# EAGLE board nutzen_05 (EAGLE 9.6.2), part 1 of 2
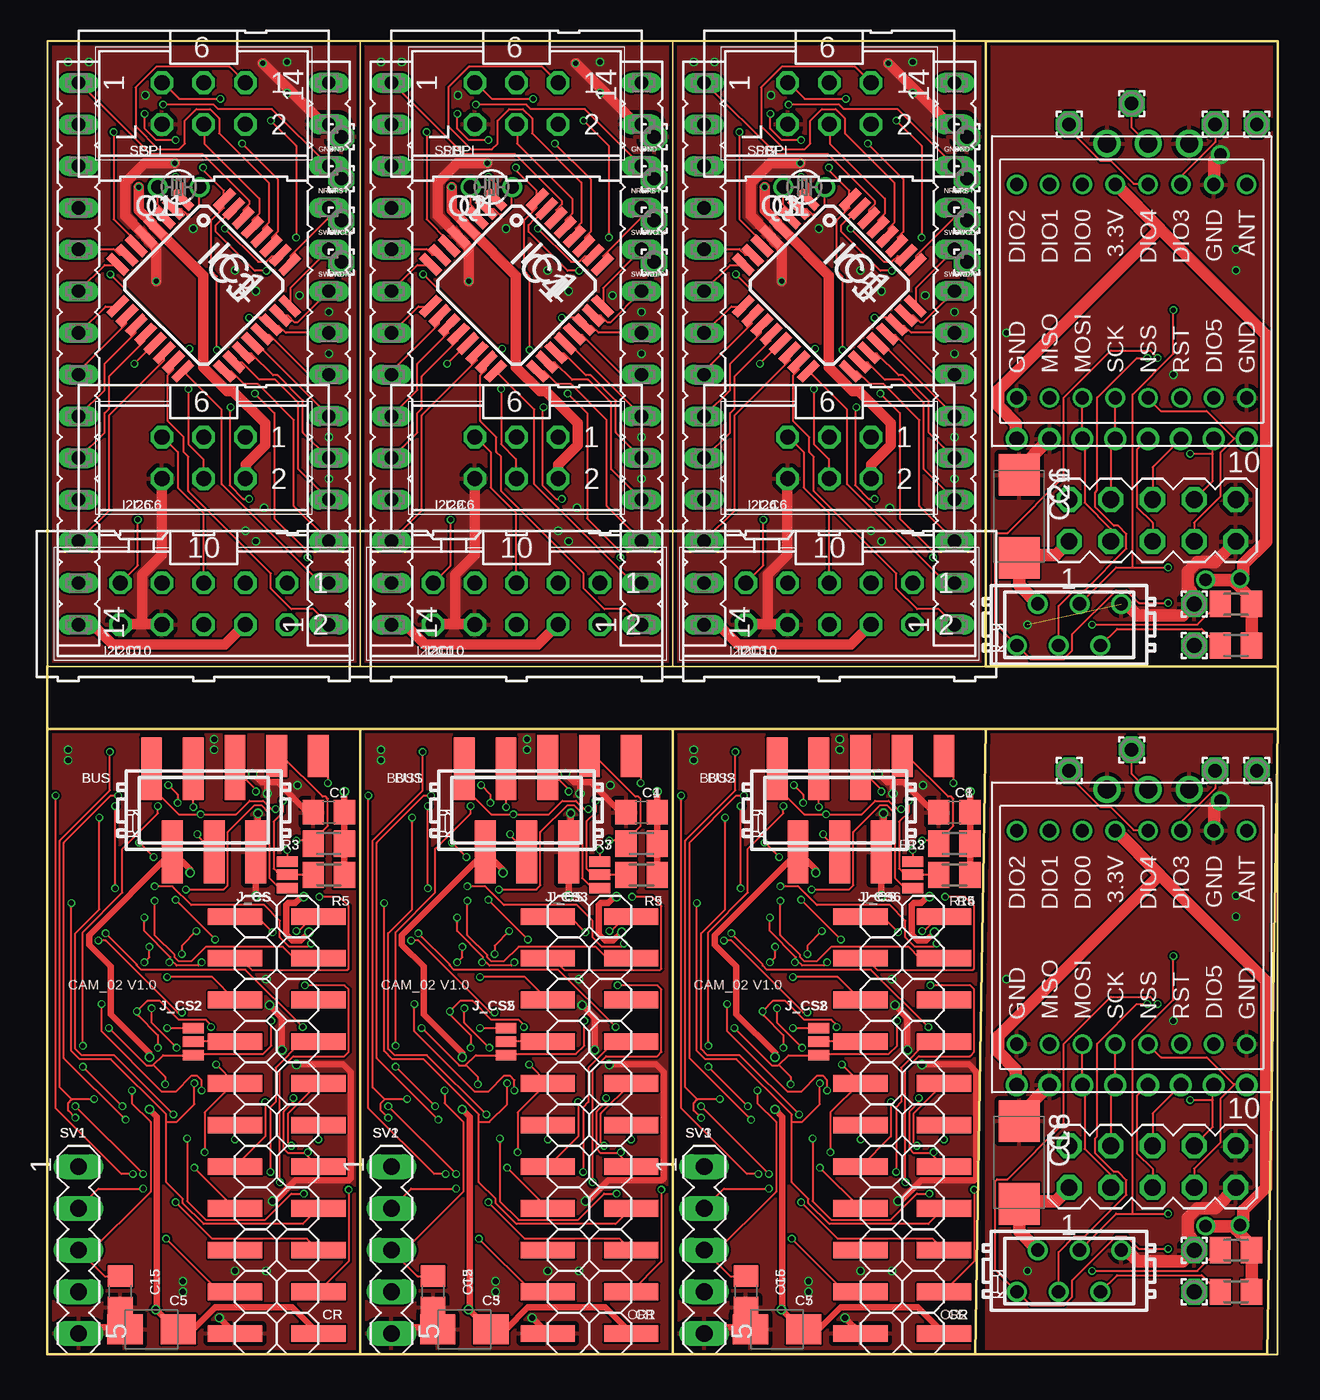
[diagram p0: board, top side]
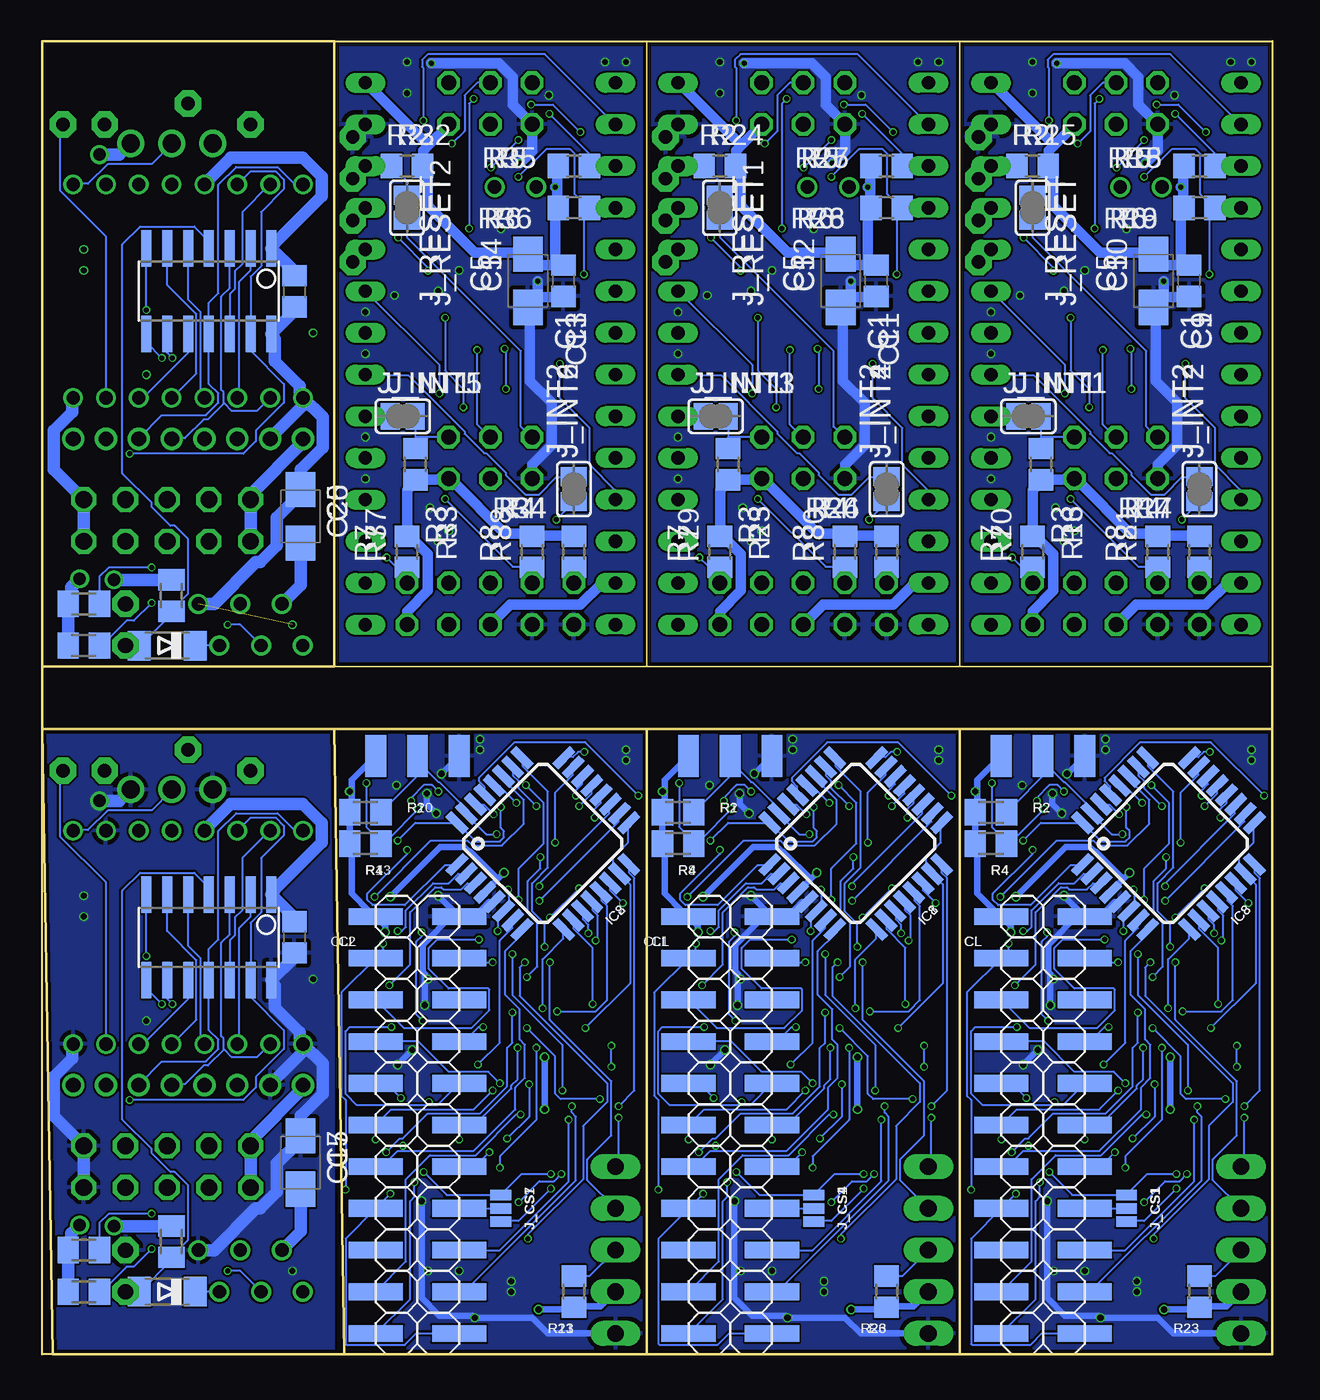
[diagram p1: board, bottom side, seen from below]

Size 74.93 x 80.01 mm. Coordinates in mm from the lower left corner, seen from the top.
Outline: 0,0 19.05,0
Outline: 19.05,38.1 0,38.1
Outline: 0,38.1 0,0
Outline: 19.05,0 38.1,0
Outline: 38.1,38.1 19.05,38.1
Outline: 19.05,38.1 19.05,0
Outline: 38.1,0 56.52,0
Outline: 57.15,38.1 38.1,38.1
Outline: 38.1,38.1 38.1,0
Outline: 0,41.91 19.05,41.91
Outline: 19.05,80.01 0,80.01
Outline: 0,80.01 0,41.91
Outline: 19.05,41.91 38.1,41.91
Outline: 38.1,80.01 19.05,80.01
Outline: 19.05,80.01 19.05,41.91
Outline: 38.1,41.91 57.15,41.91
Outline: 57.15,80.01 38.1,80.01
Outline: 38.1,80.01 38.1,41.91
Outline: 74.93,38.1 74.3,0 56.52,0
Outline: 74.93,38.1 57.15,38.1
Outline: 57.15,38.1 56.52,0
Outline: 74.93,41.91 74.93,80.01
Outline: 74.93,80.01 57.15,80.01
Outline: 57.15,80.01 57.15,41.91
Outline: 57.15,41.91 74.93,41.91
Outline: 0,38.1 0,41.91
Outline: 74.93,38.1 74.93,41.91
Outline: 0,0 74.93,0 74.93,80.01
Outline: 74.93,80.01 0,80.01
Outline: 0,80.01 0,0
Copper layers (1*16): Top 0.035559375mm / dielectric 1.6mm / Bottom 0.035559375mm
Design rules "jlcpcb2layer": minimum track width 5mil, minimum drill 12mil, track to track 5mil, track to pad 5mil, pad to pad 5mil, via to via 5mil, smd to smd 5mil, copper to edge 8mil, drill to drill 6mil, minimum pad ring 5mil, minimum via ring 3mil, stop-mask expansion 2.5mil, vias tented up to drill 0mil, thermal gap 10mil
Net classes: 1 gnd: width 0.381 mm, drill 0.381 mm; 2 power: width 0.381 mm, drill 0.381 mm

## Footprints (pad centres in the part's own frame; a part is rotated, then mirrored left to right if it is on the bottom)
MICROMATCH-6SMD = smd 1.27 x 3.81: 1 3.175,-2.54; 2 1.905,2.54; 3 0.635,-2.54; 4 -0.635,2.54; 5 -1.905,-2.54; 6 -3.175,2.54
C0805 = smd 1.3 x 1.5: 1 -0.95,0; 2 0.95,0
B/3528-21W = smd 2.15 x 1.8: + 1.625,0; - -1.625,0
C/6032-28R = smd 2.55 x 2.5: + 2.525,0; - -2.525,0
2X11SMD = smd 1.016 x 3.302: 1 -1.27,-3.81; 2 -1.27,1.27; 3 1.27,-3.81; 4 1.27,1.27; 5 3.81,-3.81; 6 3.81,1.27; 7 6.35,-3.81; 8 6.35,1.27; 9 8.89,-3.81; 10 8.89,1.27; 11 11.43,-3.81; 12 11.43,1.27; 13 13.97,-3.81; 14 13.97,1.27; 15 16.51,-3.81; 16 16.51,1.27; 17 19.05,-3.81; 18 19.05,1.27; 19 21.59,-3.81; 20 21.59,1.27; 21 24.13,-3.81; 22 24.13,1.27
MINIMELF = smd 1.4 x 1.8: A 1.7,0; C -1.7,0
1,6/0,9 = drill 0.914 pad 1.6 octagon: 1 0,0
1,6/0,8 = drill 0.813 pad 1.6 octagon: 1 0,0
ML10 = drill 0.914 octagon: 1 -5.08,-1.27; 2 -5.08,1.27; 3 -2.54,-1.27; 4 -2.54,1.27; 5 0,-1.27; 6 0,1.27; 7 2.54,-1.27; 8 2.54,1.27; 9 5.08,-1.27; 10 5.08,1.27
ML6 = drill 0.914 octagon: 1 -2.54,-1.27; 2 -2.54,1.27; 3 0,-1.27; 4 0,1.27; 5 2.54,-1.27; 6 2.54,1.27
LQFP-32 = smd 1.5 x 0.5: 1 -1.8,0; 2 -1.8,-0.8; 3 -1.8,-1.6; 4 -1.8,-2.4; 5 -1.8,-3.2; 6 -1.8,-4; 7 -1.8,-4.8; 8 -1.8,-5.6; 17 7.4,-5.6; 18 7.4,-4.8; 19 7.4,-4; 20 7.4,-3.2; 21 7.4,-2.4; 22 7.4,-1.6; 23 7.4,-0.8; 24 7.4,0 | smd 0.5 x 1.5: 9 0,-7.4; 10 0.8,-7.4; 11 1.6,-7.4; 12 2.4,-7.4; 13 3.2,-7.4; 14 4,-7.4; 15 4.8,-7.4; 16 5.6,-7.4; 25 5.6,1.8; 26 4.8,1.8; 27 4,1.8; 28 3.2,1.8; 29 2.4,1.8; 30 1.6,1.8; 31 0.8,1.8; 32 0,1.8
SOIC14 = smd 0.61 x 2.21: 1 -3.81,-2.603; 2 -2.54,-2.603; 3 -1.27,-2.603; 4 0,-2.603; 5 1.27,-2.603; 6 2.54,-2.603; 7 3.81,-2.603; 8 3.81,2.603; 9 2.54,2.603; 10 1.27,2.603; 11 0,2.603; 12 -1.27,2.603; 13 -2.54,2.603; 14 -3.81,2.603
SMT-JUMPER_3_1-NC_PASTE_NO-SILK = smd 0.635 x 1.27: 1 -0.813,0; 2 0,0; 3 0.813,0
SJ = smd 1.168 x 1.6: 1 -0.762,0; 2 0.762,0
FE14 = drill 0.813 long: 1 -15.24,0; 2 -12.7,0; 3 -10.16,0; 4 -7.62,0; 5 -5.08,0; 6 -2.54,0; 7 0,0; 8 2.54,0; 9 5.08,0; 10 7.62,0; 11 10.16,0; 12 12.7,0; 13 15.24,0; 14 17.78,0
SMD1,27-2,54 = smd 1.27 x 2.54: 1 0,0
TC26V = drill 0.813: 1 -1.27,0; 2 1.27,0
M0805 = smd 1.3 x 1.6: 1 -0.95,0; 2 0.95,0
R0805 = smd 1.3 x 1.5: 1 -0.95,0; 2 0.95,0
MA05-1 = drill 1.016 long: 1 -5.08,0; 2 -2.54,0; 3 0,0; 4 2.54,0; 5 5.08,0
MA05-2 = drill 1.016 octagon: 1 -5.08,-1.27; 2 -5.08,1.27; 3 -2.54,-1.27; 4 -2.54,1.27; 5 0,-1.27; 6 0,1.27; 7 2.54,-1.27; 8 2.54,1.27; 9 5.08,-1.27; 10 5.08,1.27
CC1101 = drill 1.1: ANT 9,-1; GND1 9,-3.5; GND2 9,1.5 | drill 0.9: CSN -9,-7; GDO0 -9,-5; GDO2 -9,-3; GND0 -9,5; SCLK -9,1; SI -9,3; SO -9,-1; VCC -9,7
WIRELESS-LORA-RFM95W#THT = drill 0.8: A1 -6.5,7; A2 -6.5,5; A3 -6.5,3; A4 -6.5,1; A5 -6.5,-1; A6 -6.5,-3; A7 -6.5,-5; A8 -6.5,-7; B1 6.5,7; B2 6.5,5; B3 6.5,3; B4 6.5,1; B5 6.5,-1; B6 6.5,-3; B7 6.5,-5; B8 6.5,-7
MICROMATCH-6 = drill 0.813: 1 3.175,1.27; 2 1.905,-1.27; 3 0.635,1.27; 4 -0.635,-1.27; 5 -1.905,1.27; 6 -3.175,-1.27

## Placement (x,y rotation side)
BUS  [MICROMATCH-6SMD]  9.53,33.15 180 top
BUS1  [MICROMATCH-6SMD]  28.57,33.15 180 top
BUS2  [MICROMATCH-6SMD]  47.62,33.15 180 top
C1  0.1  [C0805]  17.14,33.02 180 top
C2  0.1  [C0805]  23.5,3.81 270 top
C3  10u  [B/3528-21W]  25.4,1.52 0 top
C4  0.1  [C0805]  36.2,33.02 180 top
C5  10u  [B/3528-21W]  6.35,1.52 0 top
C6  0.1  [C0805]  42.55,3.81 270 top
C7  10u  [B/3528-21W]  44.45,1.52 0 top
C8  0.1  [C0805]  55.24,33.02 180 top
C9  [C0805]  5.08,65.41 270 bottom
C10  [B/3528-21W]  7.24,65.41 90 bottom
C11  [C0805]  24.13,65.41 270 bottom
C12  [B/3528-21W]  26.29,65.41 90 bottom
C13  [C0805]  43.18,65.41 270 bottom
C14  [B/3528-21W]  45.34,65.41 90 bottom
C15  0.1  [C0805]  4.45,3.81 270 top
C16  100n  [C0805]  59.56,25.4 270 bottom
C17  10u  [B/3528-21W]  59.18,11.68 270 bottom
C18  [C/6032-28R]  59.18,11.68 270 top
C19  100n  [C0805]  59.56,64.77 270 bottom
C20  10u  [B/3528-21W]  59.18,51.05 270 bottom
C21  [C/6032-28R]  59.18,51.05 270 top
CL  [2X11SMD]  12.7,25.4 270 bottom
CL1  [2X11SMD]  31.75,25.4 270 bottom
CL2  [2X11SMD]  50.8,25.4 270 bottom
CR  [2X11SMD]  12.7,2.54 90 top
CR1  [2X11SMD]  31.75,2.54 90 top
CR2  [2X11SMD]  50.8,2.54 90 top
D1  [MINIMELF]  67.31,43.18 180 bottom
D2  [MINIMELF]  67.31,3.81 180 bottom
DW  [1,6/0,9]  69.85,3.81 90 top
DW1  [1,6/0,9]  69.85,43.18 90 top
GND  [1,6/0,8]  17.91,74.17 0 top
GND1  [1,6/0,8]  36.96,74.17 0 top
GND2  [1,6/0,8]  56.01,74.17 0 top
GND_  [1,6/0,9]  69.85,6.35 90 top
GND_1  [1,6/0,9]  69.85,45.72 90 top
I2C1  [ML10]  28.57,45.72 180 top
I2C2  [ML6]  28.57,54.61 180 top
I2C3  [ML10]  47.62,45.72 180 top
I2C4  [ML6]  47.62,54.61 180 top
I2C6  [ML6]  9.53,54.61 180 top
I2C10  [ML10]  9.53,45.72 180 top
IC1  STM32G071KBT6N  [LQFP-32]  29.34,31.11 45 bottom
IC2  STM32G071KBT6N  [LQFP-32]  48.39,31.11 45 bottom
IC3  STM32G071  [LQFP-32]  9.53,69.09 315 top
IC4  STM32G071  [LQFP-32]  28.57,69.09 315 top
IC5  STM32G071  [LQFP-32]  47.62,69.09 315 top
IC6  TINY84 or TINY841  [SOIC14]  64.77,25.4 180 bottom
IC7  TINY84 or TINY841  [SOIC14]  64.77,64.77 180 bottom
IC8  STM32G071KBT6N  [LQFP-32]  10.29,31.11 45 bottom
J_CS  [SMT-JUMPER_3_1-NC_PASTE_NO-SILK]  14.61,29.21 270 top
J_CS1  [SMT-JUMPER_3_1-NC_PASTE_NO-SILK]  8.89,8.89 90 bottom
J_CS2  [SMT-JUMPER_3_1-NC_PASTE_NO-SILK]  8.89,19.05 270 top
J_CS3  [SMT-JUMPER_3_1-NC_PASTE_NO-SILK]  33.66,29.21 270 top
J_CS4  [SMT-JUMPER_3_1-NC_PASTE_NO-SILK]  27.94,8.89 90 bottom
J_CS5  [SMT-JUMPER_3_1-NC_PASTE_NO-SILK]  27.94,19.05 270 top
J_CS6  [SMT-JUMPER_3_1-NC_PASTE_NO-SILK]  52.7,29.21 270 top
J_CS7  [SMT-JUMPER_3_1-NC_PASTE_NO-SILK]  46.99,8.89 90 bottom
J_CS8  [SMT-JUMPER_3_1-NC_PASTE_NO-SILK]  46.99,19.05 270 top
J_INT1  [SJ]  14.86,57.15 180 bottom
J_INT2  [SJ]  4.45,52.7 90 bottom
J_INT3  [SJ]  33.91,57.15 180 bottom
J_INT4  [SJ]  23.5,52.7 90 bottom
J_INT5  [SJ]  52.96,57.15 180 bottom
J_INT6  [SJ]  42.55,52.7 90 bottom
J_RESET  [SJ]  14.61,69.85 90 bottom
J_RESET1  [SJ]  33.66,69.85 90 bottom
J_RESET2  [SJ]  52.7,69.85 90 bottom
L  [FE14]  1.91,62.23 270 top
L1  [FE14]  20.95,62.23 270 top
L2  [FE14]  40.01,62.23 270 top
NRST  [1,6/0,8]  17.91,71.63 0 top
NRST1  [1,6/0,8]  36.96,71.63 0 top
NRST2  [1,6/0,8]  56.01,71.63 0 top
PAD1  [SMD1,27-2,54]  16.51,36.45 0 top
PAD2  [SMD1,27-2,54]  16.51,36.45 0 bottom
PAD3  [SMD1,27-2,54]  13.97,36.45 0 top
PAD4  [SMD1,27-2,54]  13.97,36.45 0 bottom
PAD5  [SMD1,27-2,54]  11.43,36.45 0 top
PAD6  [SMD1,27-2,54]  11.43,36.45 0 bottom
PAD7  [SMD1,27-2,54]  35.56,36.45 0 top
PAD8  [SMD1,27-2,54]  35.56,36.45 0 bottom
PAD9  [SMD1,27-2,54]  33.02,36.45 0 top
PAD10  [SMD1,27-2,54]  33.02,36.45 0 bottom
PAD11  [SMD1,27-2,54]  30.48,36.45 0 top
PAD12  [SMD1,27-2,54]  30.48,36.45 0 bottom
PAD13  [SMD1,27-2,54]  54.61,36.45 0 top
PAD14  [SMD1,27-2,54]  54.61,36.45 0 bottom
PAD15  [SMD1,27-2,54]  52.07,36.45 0 top
PAD16  [SMD1,27-2,54]  52.07,36.45 0 bottom
PAD17  [SMD1,27-2,54]  49.53,36.45 0 top
PAD18  [SMD1,27-2,54]  49.53,36.45 0 bottom
PAD19  [1,6/0,8]  66.04,36.83 90 top
PAD20  [1,6/0,8]  71.12,35.56 90 top
PAD21  [1,6/0,8]  62.23,35.56 90 top
PAD22  [1,6/0,8]  73.66,35.56 90 top
PAD23  [1,6/0,8]  66.04,76.2 90 top
PAD24  [1,6/0,8]  71.12,74.93 90 top
PAD25  [1,6/0,8]  62.23,74.93 90 top
PAD26  [1,6/0,8]  73.66,74.93 90 top
Q1  [TC26V]  8,71.12 0 top
Q2  [TC26V]  27.05,71.12 0 top
Q3  [TC26V]  46.1,71.12 0 top
R  [FE14]  17.14,59.69 90 top
R1  10k  [M0805]  36.2,33.02 0 bottom
R2  10k  [M0805]  17.14,33.02 0 bottom
R3  10k  [M0805]  17.14,31.11 180 top
R4  10k  [M0805]  17.14,31.11 0 bottom
R5  10k  [M0805]  17.14,29.21 180 top
R6  100K  [R0805]  23.5,3.81 270 bottom
R7  10k  [M0805]  36.2,31.11 180 top
R8  10k  [M0805]  36.2,31.11 0 bottom
R9  10k  [M0805]  36.2,29.21 180 top
R10  10k  [M0805]  55.24,33.02 0 bottom
R11  100K  [R0805]  42.55,3.81 270 bottom
R12  10k  [M0805]  55.24,31.11 180 top
R13  10k  [M0805]  55.24,31.11 0 bottom
R14  10k  [M0805]  55.24,29.21 180 top
R15  [R0805]  14.61,72.39 0 bottom
R16  [R0805]  14.1,54.23 270 bottom
R17  [R0805]  4.45,48.9 90 bottom
R18  [R0805]  4.45,72.39 180 bottom
R19  [R0805]  4.45,69.85 180 bottom
R20  [R0805]  14.61,48.9 90 bottom
R21  [R0805]  6.99,48.9 90 bottom
R22  [FE14]  36.2,59.69 90 top
R23  100K  [R0805]  4.45,3.81 270 bottom
R24  [R0805]  33.66,72.39 0 bottom
R25  [R0805]  33.15,54.23 270 bottom
R26  [R0805]  23.5,48.9 90 bottom
R27  [R0805]  23.5,72.39 180 bottom
R28  [R0805]  23.5,69.85 180 bottom
R29  [R0805]  33.66,48.9 90 bottom
R30  [R0805]  26.04,48.9 90 bottom
R31  [FE14]  55.24,59.69 90 top
R32  [R0805]  52.7,72.39 0 bottom
R33  [R0805]  52.2,54.23 270 bottom
R34  [R0805]  42.55,48.9 90 bottom
R35  [R0805]  42.55,72.39 180 bottom
R36  [R0805]  42.55,69.85 180 bottom
R37  [R0805]  52.7,48.9 90 bottom
R38  [R0805]  45.09,48.9 90 bottom
R39  10k  [M0805]  67.06,6.86 270 bottom
R40  10k  [M0805]  72.39,6.35 0 bottom
R41  10k  [M0805]  72.39,6.35 180 top
R42  10k  [M0805]  72.39,3.81 0 bottom
R43  10k  [M0805]  72.39,3.81 180 top
R44  10k  [M0805]  67.06,46.23 270 bottom
R45  10k  [M0805]  72.39,45.72 0 bottom
R46  10k  [M0805]  72.39,45.72 180 top
R47  10k  [M0805]  72.39,43.18 0 bottom
R48  10k  [M0805]  72.39,43.18 180 top
SPI  [ML6]  9.53,76.2 180 top
SPI1  [ML6]  28.57,76.2 180 top
SPI2  [ML6]  47.62,76.2 180 top
SV1  [MA05-1]  1.91,6.35 270 top
SV2  [MA05-1]  20.95,6.35 270 top
SV3  [MA05-1]  40.01,6.35 270 top
SV4  [MA05-2]  67.31,11.43 0 top
SV5  [MA05-2]  67.31,50.8 0 top
SWCLK  [1,6/0,8]  17.91,69.09 0 top
SWCLK1  [1,6/0,8]  36.96,69.09 0 top
SWCLK2  [1,6/0,8]  56.01,69.09 0 top
SWDIO  [1,6/0,8]  17.91,66.55 0 top
SWDIO1  [1,6/0,8]  36.96,66.55 0 top
SWDIO2  [1,6/0,8]  56.01,66.55 0 top
U$1  CC1101  [CC1101]  66.04,25.4 90 top
U$2  CC1101  [CC1101]  66.04,64.77 90 top
U$3  WIRELESS-LORA-RFM95W#THT  [WIRELESS-LORA-RFM95W#THT]  66.04,25.4 90 top
U$4  WIRELESS-LORA-RFM95W#THT  [WIRELESS-LORA-RFM95W#THT]  66.04,64.77 90 top
X1  BUS  [MICROMATCH-6]  62.23,5.08 180 top
X2  BUS  [MICROMATCH-6]  62.23,44.45 180 top

## Library data of the parts
BUS BUS1 BUS2 = con-amp-micromatch
C1 C2 C4 C6 C8 C15 C16 C19 R6 R11 R23 = rcl
C3 C5 C7 C9-C14 C17 C18 C20 C21 = rcl; SPICEPREFIX: C
CL CL1 CL2 CR CR1 CR2 = pinhead-1
D1 D2 = diode
DW DW1 GND GND1 GND2 GND_ GND_1 NRST NRST1 NRST2 PAD1-PAD26 SWCLK SWCLK1 SWCLK2 SWDIO SWDIO1 SWDIO2 = wirepad
I2C1-I2C4 I2C6 I2C10 SPI SPI1 SPI2 = con-harting-ml; OC_FARNELL: unknown; OC_NEWARK: unknown
IC1-IC5 IC8 = stm32
IC6 IC7 = avr-7
J_CS J_CS1-J_CS8 = SparkFun-Jumpers
J_INT1-J_INT6 J_RESET J_RESET1 J_RESET2 = jumper
L L1 L2 R R22 R31 = con-lsta-my
Q1-Q3 = crystal; OC_FARNELL: unknown; OC_NEWARK: unknown
R1-R5 R7-R10 R12-R21 R24-R30 R32-R48 = rcl; SPICEPREFIX: R
SV1-SV5 = con-lstb; OC_FARNELL: unknown; OC_NEWARK: unknown
U$1 U$2 = modules
U$3 U$4 = diy-modules
X1 X2 = con-amp-micromatch; MPN: 7-215464-6; OC_FARNELL: 3784630; OC_NEWARK: 19R8125

## Nets
BUS_INT: IC6.8 R42.2 X1.1
BUS_INT1: IC7.8 R47.2 X2.1
BUS_P1: BUS1.5 J_CS3.2 PAD11.1 R9.2
BUS_P2: BUS2.5 J_CS6.2 PAD17.1 R14.2
BUS_P5: BUS.5 J_CS.2 PAD5.1 R5.2
BUS_RESET: I2C6.5 I2C10.5 J_RESET.1
BUS_RESET1: I2C1.5 I2C2.5 J_RESET1.1
BUS_RESET2: I2C3.5 I2C4.5 J_RESET2.1
BUS_RESET3: D2.C R43.2 X1.5
BUS_RESET4: D1.C R48.2 X2.5
BUS_SCL: IC6.9 R41.2 X1.3
BUS_SCL1: IC7.9 R46.2 X2.3
BUS_SDA: IC6.7 R40.2 X1.4
BUS_SDA1: IC7.7 R45.2 X2.4
C_D0: CL.14 CR.14 IC8.7
C_D1: CL.13 CR.13 IC8.8
C_D2: CL.12 CR.12 IC8.9
C_D3: CL.11 CR.11 IC8.10
C_D4: CL.10 CR.10 IC8.11
C_D5: CL.9 CR.9 IC8.12
C_D6: CL.8 CR.8 IC8.13
C_D7: CL.7 CR.7 IC8.14
C_D8: CL1.7 CR1.7 IC1.14
C_D9: CL1.8 CR1.8 IC1.13
C_D10: CL1.9 CR1.9 IC1.12
C_D11: CL1.10 CR1.10 IC1.11
C_D12: CL1.11 CR1.11 IC1.10
C_D13: CL1.12 CR1.12 IC1.9
C_D14: CL1.13 CR1.13 IC1.8
C_D15: CL1.14 CR1.14 IC1.7
C_D16: CL2.7 CR2.7 IC2.14
C_D17: CL2.8 CR2.8 IC2.13
C_D18: CL2.9 CR2.9 IC2.12
C_D19: CL2.10 CR2.10 IC2.11
C_D20: CL2.11 CR2.11 IC2.10
C_D21: CL2.12 CR2.12 IC2.9
C_D22: CL2.13 CR2.13 IC2.8
C_D23: CL2.14 CR2.14 IC2.7
CL_OE: CL.20 IC8.26
CL_OE1: CL1.20 IC1.26
CL_OE2: CL2.20 IC2.26
CL_PWDN: CL.16 J_CS1.2
CL_PWDN1: CL1.16 J_CS4.2
CL_PWDN2: CL2.16 J_CS7.2
CL_RCK: CL.18 IC8.22
CL_RCK1: CL1.18 IC1.22
CL_RCK2: CL2.18 IC2.22
CL_RST: CL.15 CL.22 CR.22 IC8.15 IC8.17 J_CS2.3
CL_RST1: CL1.15 CL1.22 CR1.22 IC1.15 IC1.17 J_CS5.3
CL_RST2: CL2.15 CL2.22 CR2.22 IC2.15 IC2.17 J_CS8.3
CL_VSYNC: CL.5 IC8.28
CL_VSYNC1: CL1.5 IC1.28
CL_VSYNC2: CL2.5 IC2.28
CL_WR: CL.19 IC8.20
CL_WR1: CL1.19 IC1.20
CL_WR2: CL2.19 IC2.20
CL_WRST: CL.21 IC8.3
CL_WRST1: CL1.21 IC1.3
CL_WRST2: CL2.21 IC2.3
CR_OE: CR.20 IC8.27
CR_OE1: CR1.20 IC1.27
CR_OE2: CR2.20 IC2.27
CR_PWDN: CR.16 J_CS2.2
CR_PWDN1: CR1.16 J_CS5.2
CR_PWDN2: CR2.16 J_CS8.2
CR_RCK: CR.18 IC8.23
CR_RCK1: CR1.18 IC1.23
CR_RCK2: CR2.18 IC2.23
CR_RST: CR.15 IC8.16 J_CS1.3
CR_RST1: CR1.15 IC1.16 J_CS4.3
CR_RST2: CR2.15 IC2.16 J_CS7.3
CR_VSYNC: CR.5 IC8.29
CR_VSYNC1: CR1.5 IC1.29
CR_VSYNC2: CR2.5 IC2.29
CR_WR: CR.19 IC8.18
CR_WR1: CR1.19 IC1.18
CR_WR2: CR2.19 IC2.18
CR_WRST: CR.21 IC8.2
CR_WRST1: CR1.21 IC1.2
CR_WRST2: CR2.21 IC2.2
CS0: IC6.6 SV4.7 U$1.CSN U$3.A5
CS1: IC7.6 SV5.7 U$2.CSN U$4.A5
DW: D2.A DW.1 IC6.4 R39.2
DW1: D1.A DW1.1 IC7.4 R44.2
FON1: I2C1.3
FON2: I2C10.3
FON3: I2C3.3
GND [gnd]: BUS.6 C1.2 C5.- C15.2 CL.2 CR.2 IC8.5 PAD6.1 SV1.5
GND1 [gnd]: BUS1.6 C2.2 C3.- C4.2 CL1.2 CR1.2 IC1.5 PAD12.1 SV2.5
GND2 [gnd]: BUS2.6 C6.2 C7.- C8.2 CL2.2 CR2.2 IC2.5 PAD18.1 SV3.5
GND3 [gnd]: C9.2 C10.- GND.1 I2C6.6 I2C10.8 I2C10.10 IC3.5 R.13 SPI.6
GND4 [gnd]: C11.2 C12.- GND1.1 I2C1.8 I2C1.10 I2C2.6 IC4.5 R22.13 SPI1.6
GND5 [gnd]: C13.2 C14.- GND2.1 I2C3.8 I2C3.10 I2C4.6 IC5.5 R31.13 SPI2.6
GND6 [gnd]: C16.2 C17.- C18.- GND_.1 IC6.14 SV4.9 SV4.10 U$1.GND0 U$1.GND1 U$1.GND2 U$3.A1 U$3.A8 U$3.B7 X1.6
GND7 [gnd]: C19.2 C20.- C21.- GND_1.1 IC7.14 SV5.9 SV5.10 U$2.GND0 U$2.GND1 U$2.GND2 U$4.A1 U$4.A8 U$4.B7 X2.6
GPIO0: IC6.13 SV4.8 U$1.GDO0 U$3.B3
GPIO1: IC6.12 U$3.B2
GPIO2: IC6.11 SV4.6 U$1.GDO2 U$3.B1
GPIO3: IC7.13 SV5.8 U$2.GDO0 U$4.B3
GPIO4: IC7.11 SV5.6 U$2.GDO2 U$4.B1
GPIO5: IC7.12 U$4.B2
INT1: I2C6.1 J_INT1.1 R16.1
INT2: I2C10.9 J_INT2.1 R17.1
INT3: I2C2.1 J_INT3.1 R25.1
INT4: I2C1.9 J_INT4.1 R26.1
INT5: I2C4.1 J_INT5.1 R33.1
INT6: I2C3.9 J_INT6.1 R34.1
MISO: IC6.3 SV4.5 U$1.SO U$3.A2
MISO1: IC7.3 SV5.5 U$2.SO U$4.A2
MOSI: IC6.2 SV4.3 U$1.SI U$3.A3
MOSI1: IC7.2 SV5.3 U$2.SI U$4.A3
N$1: IC4.2 Q2.2
N$2: IC4.3 Q2.1
N$3: IC5.2 Q3.2
N$4: IC5.3 Q3.1
N$5: PAD19.1 U$1.ANT U$3.B8
N$6: PAD20.1 U$3.B6
N$7: PAD21.1 U$3.B5
N$8: PAD22.1 U$3.A7
N$9: PAD23.1 U$2.ANT U$4.B8
N$10: PAD24.1 U$4.B6
N$11: PAD25.1 U$4.B5
N$12: PAD26.1 U$4.A7
N$30: IC3.2 Q1.2
N$31: IC3.3 Q1.1
NRST: IC3.6 J_RESET.2 NRST.1 R15.1 R.12
NRST1: IC4.6 J_RESET1.2 NRST1.1 R22.12 R24.1
NRST2: IC5.6 J_RESET2.2 NRST2.1 R31.12 R32.1
PA0: IC3.7 L.5
PA1: IC3.8 L.6
PA2: IC3.9 L.7
PA3: IC3.10 L.8
PA4: IC3.11 L.9
PA5: IC3.12 L.10
PA6: IC3.13 L.11
PA7: IC3.14 L.12
PA8: IC3.18 R.4
PA9: IC3.19 R.5
PA10: IC3.21 J_INT2.2 R.7
PA11: IC4.7 L1.5
PA12: IC4.8 L1.6
PA13: IC4.9 L1.7
PA14: IC4.10 L1.8
PA15: IC4.11 L1.9
PA16: IC4.12 L1.10
PA17: IC4.18 R22.4
PA18: IC4.19 R22.5
PA19: IC4.13 L1.11
PA20: IC4.14 L1.12
PA21: IC4.21 J_INT4.2 R22.7
PA22: IC5.7 L2.5
PA23: IC5.8 L2.6
PA24: IC5.9 L2.7
PA25: IC5.10 L2.8
PA26: IC5.11 L2.9
PA27: IC5.12 L2.10
PA28: IC5.18 R31.4
PA29: IC5.19 R31.5
PA30: IC5.13 L2.11
PA31: IC5.14 L2.12
PA32: IC5.21 J_INT6.2 R31.7
PB0: IC3.15 R.1
PB1: IC3.16 R.2
PB2: IC4.16 R22.2
PB3: IC4.17 R22.3
PB4: IC4.30 L1.1
PB5: IC4.15 R22.1
PB6: IC3.30 L.1
PB7: IC3.31 L.2
PB8: IC4.31 L1.2
PB9: IC5.16 R31.2
PB10: IC5.17 R31.3
PB11: IC5.30 L2.1
PB12: IC5.15 R31.1
PB13: IC5.31 L2.2
PB15: IC3.17 R.3
PC1: IC4.20 J_INT3.2 R22.6
PC2: IC5.20 J_INT5.2 R31.6
PC6: IC3.20 J_INT1.2 R.6
RESOUT: IC6.10 U$3.A6
RESOUT1: IC7.10 U$4.A6
SCK: IC6.5 SV4.4 U$1.SCLK U$3.A4
SCK1: IC7.5 SV5.4 U$2.SCLK U$4.A4
SCL: CL.3 CR.3 IC8.19
SCL1: CL1.3 CR1.3 IC1.19
SCL2: CL2.3 CR2.3 IC2.19
SCL3: I2C6.3 IC3.32 L.3 R18.1
SCL4: I2C10.7 IC3.22 R21.1 R.8
SCL5: I2C2.3 IC4.32 L1.3 R27.1
SCL6: I2C1.7 IC4.22 R22.8 R30.1
SCL7: I2C4.3 IC5.32 L2.3 R35.1
SCL8: I2C3.7 IC5.22 R31.8 R38.1
SDA: CL.4 CR.4 IC8.21
SDA1: CL1.4 CR1.4 IC1.21
SDA2: CL2.4 CR2.4 IC2.21
SDA3: I2C6.4 IC3.1 L.4 R19.1
SDA4: I2C10.1 IC3.23 R20.1 R.9
SDA5: I2C2.4 IC4.1 L1.4 R28.1
SDA6: I2C1.1 IC4.23 R22.9 R29.1
SDA7: I2C4.4 IC5.1 L2.4 R36.1
SDA8: I2C3.1 IC5.23 R31.9 R37.1
SPI1_MISO: IC3.28 SPI.1
SPI1_MISO1: IC4.28 SPI1.1
SPI1_MISO2: IC5.28 SPI2.1
SPI1_MOSI: IC3.29 SPI.4
SPI1_MOSI1: IC4.29 SPI1.4
SPI1_MOSI2: IC5.29 SPI2.4
SPI1_SCK: IC3.27 SPI.3
SPI1_SCK1: IC4.27 SPI1.3
SPI1_SCK2: IC5.27 SPI2.3
SPI1_SS: IC3.26 SPI.5
SPI1_SS1: IC4.26 SPI1.5
SPI1_SS2: IC5.26 SPI2.5
SPI_CS: IC8.1 J_CS.1
SPI_CS1: IC1.1 J_CS3.1
SPI_CS2: IC2.1 J_CS6.1
SPI_MISO: BUS.1 IC8.30 PAD1.1 R4.2
SPI_MISO1: BUS1.1 IC1.30 PAD7.1 R8.2
SPI_MISO2: BUS2.1 IC2.30 PAD13.1 R13.2
SPI_MOSI: BUS.4 IC8.31 PAD4.1 R2.2
SPI_MOSI1: BUS1.4 IC1.31 PAD10.1 R1.2
SPI_MOSI2: BUS2.4 IC2.31 PAD16.1 R10.2
SPI_SCK: BUS.3 IC8.32 PAD3.1 R3.2
SPI_SCK1: BUS1.3 IC1.32 PAD9.1 R7.2
SPI_SCK2: BUS2.3 IC2.32 PAD15.1 R12.2
SWCLK: IC8.25 J_CS1.1 SV1.2
SWCLK1: IC1.25 J_CS4.1 SV2.2
SWCLK2: IC2.25 J_CS7.1 SV3.2
SWCLK3: IC3.25 R.11 SWCLK.1
SWCLK4: IC4.25 R22.11 SWCLK1.1
SWCLK5: IC5.25 R31.11 SWCLK2.1
SWDIO: IC8.24 J_CS2.1 SV1.1
SWDIO1: IC1.24 J_CS5.1 SV2.1
SWDIO2: IC2.24 J_CS8.1 SV3.1
SWDIO3: IC3.24 R.10 SWDIO.1
SWDIO4: IC4.24 R22.10 SWDIO1.1
SWDIO5: IC5.24 R31.10 SWDIO2.1
SWRES: C15.1 IC8.6 J_CS.3 R23.1 SV1.3
SWRES1: C2.1 IC1.6 J_CS3.3 R6.1 SV2.3
SWRES2: C6.1 IC2.6 J_CS6.3 R11.1 SV3.3
U1 [power]: I2C1.4 L1.14
U2 [power]: I2C3.4 L2.14
U3.1 [power]: BUS1.2 C3.+ C4.1 CL1.1 CR1.1 IC1.4 PAD8.1 R1.1 R6.2 R7.1 R8.1 R9.1 SV2.4
U3.2 [power]: BUS2.2 C7.+ C8.1 CL2.1 CR2.1 IC2.4 PAD14.1 R10.1 R11.2 R12.1 R13.1 R14.1 SV3.4
U3.3 [power]: BUS.2 C1.1 C5.+ CL.1 CR.1 IC8.4 PAD2.1 R2.1 R3.1 R4.1 R5.1 R23.2 SV1.4
U5 [power]: I2C10.4 L.14
UBAT [power]: I2C10.6 L.13
UBAT1 [power]: I2C1.6 L1.13
UBAT2 [power]: I2C3.6 L2.13
VCC [power]: C9.1 C10.+ I2C6.2 I2C10.2 IC3.4 R15.2 R16.2 R17.2 R18.2 R19.2 R20.2 R21.2 R.14 SPI.2
VCC1 [power]: C11.1 C12.+ I2C1.2 I2C2.2 IC4.4 R22.14 R24.2 R25.2 R26.2 R27.2 R28.2 R29.2 R30.2 SPI1.2
VCC2 [power]: C13.1 C14.+ I2C3.2 I2C4.2 IC5.4 R31.14 R32.2 R33.2 R34.2 R35.2 R36.2 R37.2 R38.2 SPI2.2
VCC3 [power]: C16.1 C17.+ C18.+ IC6.1 R39.1 R40.1 R41.1 R42.1 R43.1 SV4.1 SV4.2 U$1.VCC U$3.B4 X1.2
VCC4 [power]: C19.1 C20.+ C21.+ IC7.1 R44.1 R45.1 R46.1 R47.1 R48.1 SV5.1 SV5.2 U$2.VCC U$4.B4 X2.2

## Tracks (layer width: path | path; a pad name or v marks a point on that pad's centre or on a via)
BUS_INT  (via drill 0.3)
  Top 0.127: v68.26,6.41 66.48,6.41 65.72,7.18 65.09,7.18 62.42,4.51 62.42,3.49 61.91,2.98 59.88,2.98 X1.1 57.72,5.14 57.72,10.54 57.85,10.67 58.48,10.67 61.91,14.1 61.91,18.92 64.77,21.78 67.18,21.78 v67.63,21.34
  Bottom 0.127: R42.2 71.31,3.81 69.79,5.33 69.34,5.33 v68.26,6.41 | IC6.8 68.58,22.29 v67.63,21.34
BUS_INT1  (via drill 0.3)
  Top 0.127: v68.26,45.78 66.48,45.78 65.72,46.55 65.09,46.55 62.42,43.88 62.42,42.86 61.91,42.35 59.88,42.35 X2.1 57.72,44.51 57.72,49.91 57.85,50.04 58.48,50.04 61.91,53.47 61.91,58.29 64.77,61.15 67.18,61.15 v67.63,60.71
  Bottom 0.127: R47.2 71.31,43.18 69.79,44.7 69.34,44.7 v68.26,45.78 | IC7.8 68.58,61.66 v67.63,60.71
BUS_P1  (via drill 0.3)
  Top 0.127: R9.2 J_CS3.2 33.21,29.21 32.83,29.59 32.83,32.45 33.4,33.02 v33.4,33.72 | v31.75,34.29 31.75,34.42 BUS1.5 PAD11.1
  Bottom 0.127: v33.4,33.72 33.4,33.91 32.64,34.67 32.13,34.67 v31.75,34.29
BUS_P2  (via drill 0.3)
  Top 0.127: R14.2 J_CS6.2 52.26,29.21 51.88,29.59 51.88,32.45 52.45,33.02 v52.45,33.72 | v50.8,34.29 50.8,34.42 BUS2.5 PAD17.1
  Bottom 0.127: v52.45,33.72 52.45,33.91 51.69,34.67 51.18,34.67 v50.8,34.29
BUS_P5  (via drill 0.3)
  Top 0.127: R5.2 J_CS.2 14.16,29.21 13.78,29.59 13.78,32.45 14.35,33.02 v14.35,33.72 | v12.7,34.29 12.7,34.42 BUS.5 PAD5.1
  Bottom 0.127: v14.35,33.72 14.35,33.91 13.59,34.67 13.08,34.67 v12.7,34.29
BUS_RESET
  Top 0.127: I2C10.5 9.49,47.01 9.49,51.27 7.96,52.81 7.96,54.97 7.05,55.88 I2C6.5
  Bottom 0.127: J_RESET.1 14.59,69.08 14.59,68.03 7.68,61.12 7.68,56.51 7.05,55.88 I2C6.5
BUS_RESET1
  Top 0.127: I2C1.5 28.54,47.01 28.54,51.27 27.01,52.81 27.01,54.97 26.1,55.88 I2C2.5
  Bottom 0.127: J_RESET1.1 33.64,69.08 33.64,68.03 26.73,61.12 26.73,56.51 26.1,55.88 I2C2.5
BUS_RESET2
  Top 0.127: I2C3.5 47.59,47.01 47.59,51.27 46.06,52.81 46.06,54.97 45.15,55.88 I2C4.5
  Bottom 0.127: J_RESET2.1 52.69,68.03 45.78,61.12 45.78,56.51 45.15,55.88 I2C4.5
BUS_RESET3
  Top 0.127: R43.2 71.31,3.81 70.29,4.83 65.15,4.83 X1.5
  Bottom 0.127: X1.5 D2.C
BUS_RESET4
  Top 0.127: R48.2 71.31,43.18 70.29,44.2 65.15,44.2 X2.5
  Bottom 0.127: X2.5 D1.C
BUS_SCL  (via drill 0.3)
  Top 0.127: R41.2 71.31,6.35 70.04,5.08 v63.63,5.08 | v66.99,21.34 66.36,21.34 63.94,18.92 63.94,13.27 63.82,13.14 63.82,12.26 64.96,11.11 65.22,11.11 65.72,10.6 65.72,9.72 63.18,7.18 62.55,7.18 61.59,6.22 X1.3
  Bottom 0.127: v63.63,5.08 62.87,5.08 X1.3 | IC6.9 67.31,21.65 v66.99,21.34
BUS_SCL1  (via drill 0.3)
  Top 0.127: R46.2 71.31,45.72 70.04,44.45 v63.63,44.45 | v66.99,60.71 66.36,60.71 63.94,58.29 63.94,52.64 63.82,52.51 63.82,51.63 64.96,50.48 65.22,50.48 65.72,49.97 65.72,49.09 63.18,46.55 62.55,46.55 61.59,45.59 X2.3
  Bottom 0.127: v63.63,44.45 62.87,44.45 X2.3 | IC7.9 67.31,61.02 v66.99,60.71
BUS_SDA  (via drill 0.3)
  Top 0.127: 66.1,8.57 65.09,8.57 X1.4 | 66.1,8.57 v68.26,8.57 | v68.58,24.26 68.58,21.59 66.1,19.11 66.1,8.57
  Bottom 0.127: v68.26,8.57 70.87,8.57 71.44,8 R40.2 | v68.58,24.26 IC6.7
BUS_SDA1  (via drill 0.3)
  Top 0.127: 66.1,47.94 65.09,47.94 X2.4 | 66.1,47.94 v68.26,47.94 | v68.58,63.63 68.58,60.96 66.1,58.48 66.1,47.94
  Bottom 0.127: v68.26,47.94 70.87,47.94 71.44,47.37 R45.2 | v68.58,63.63 IC7.7
C_D0  (via drill 0.3)
  Top 0.127: v10.29,17.65 CR.14 11.37,16.51 9.59,14.73 v9.59,12.32
  Bottom 0.127: v10.29,17.65 8.95,18.99 8.95,25.21 8.19,25.97 8.19,26.42 IC8.7 | CL.14 10.48,11.43 v9.59,12.32
C_D1  (via drill 0.3)
  Top 0.127: CR.13 14.67,14.67 14.67,12.89 v14.86,12.7
  Bottom 0.127: 14.86,12.38 15.18,12.38 16.13,11.43 CL.13 | 14.86,12.38 10.54,12.38 8,14.92 8,16.26 7.43,16.83 7.43,18.86 7.75,19.18 7.75,21.02 8.64,21.91 8.64,24.57 7.62,25.59 7.62,25.84 IC8.8 | 14.86,12.38 v14.86,12.7
C_D2  (via drill 0.3)
  Top 0.127: v6.35,21.08 6.35,20.19 v7.87,18.67 | v11.43,13.08 CR.12
  Bottom 0.127: v6.35,21.08 6.35,24.07 5.08,25.34 5.08,25.84 IC8.9 | v7.87,18.67 7.87,16.76 8.26,16.38 8.26,16.19 10.48,13.97 CR.12 v11.43,13.08
C_D3  (via drill 0.3)
  Top 0.127: v3.3,21.34 3.3,19.68 6.99,16 7.81,16 8.76,16.95 9.14,16.95 9.4,16.7 v9.4,16.07 | v16.51,13.08 CR.11
  Bottom 0.127: v3.3,21.34 3.3,24.77 4.45,25.91 4.45,26.42 IC8.10 | v9.4,16.07 10.54,14.92 15.56,14.92 CR.11 v16.51,13.08
C_D4  (via drill 0.3)
  Top 0.127: v3.56,25.65 5.46,23.75 5.46,23.69 5.71,23.43 12.06,23.43 v15.56,19.94 | CR.10 13.27,13.27 v13.27,15.37
  Bottom 0.127: v3.56,25.65 3.56,26.16 3.87,26.48 3.87,26.99 IC8.11 | v15.56,19.94 18.1,19.94 18.35,19.68 18.35,15.88 17.65,15.18 13.27,15.18 | 13.27,15.18 12.76,15.18 CL.10 | 13.27,15.18 v13.27,15.37
C_D5  (via drill 0.3)
  Top 0.127: v3.11,25.21 3.56,25.21 7.94,20.83 v8.19,20.83 | 15.88,12.26 15.88,12.06 CR.9 | v14.99,15.62 14.99,15.37 14.41,14.8 14.41,12.51 14.67,12.26 15.88,12.26 | 15.88,12.26 v15.88,12.32
  Bottom 0.127: v3.11,25.21 2.98,25.34 2.98,26.73 3.3,27.05 3.3,27.56 IC8.12 | v8.19,20.83 8.19,18.99 8.51,18.67 8.51,16.32 10.16,14.67 13.34,14.67 14.86,13.14 15.05,13.14 v15.88,12.32 | CL.9 15.88,16.51 v14.99,15.62
C_D6  (via drill 0.3)
  Top 0.127: v9.97,19.94 9.97,20.07 9.65,20.38 8,20.38 6.86,21.53 6.1,21.53 v5.46,20.89 5.52,20.89 5.52,20.64 6.73,19.43 v6.73,18.67 | v8.95,11.37 CR.8
  Bottom 0.127: v5.46,20.89 3.11,20.89 2.41,21.59 2.41,27.3 2.73,27.62 2.73,28.13 IC8.13 | v9.97,19.94 10.22,19.94 11.11,19.05 CL.8 | v8.95,11.37 8.95,12.06 6.73,14.29 v6.73,18.67
C_D7  (via drill 0.3)
  Top 0.127: v1.46,27.5 1.46,18.48 1.97,17.97 3.87,17.97 7.24,14.61 7.24,14.16 | 7.24,14.16 7.24,10.48 8.26,9.46 8.26,9.21 9.53,7.94 15.56,7.94 CR.7 | v8.95,16.51 8.95,15.24 7.87,14.16 7.24,14.16
  Bottom 0.127: v1.46,27.5 2.22,28.26 IC8.14 | CL.7 13.91,19.05 12.06,17.21 9.65,17.21 v8.95,16.51
C_D8  (via drill 0.3)
  Top 0.127: v20.51,27.5 20.51,18.48 21.02,17.97 22.92,17.97 26.29,14.61 26.29,14.16 | 26.29,14.16 26.29,10.48 27.3,9.46 27.3,9.21 28.57,7.94 34.61,7.94 CR1.7 | v28,16.51 28,15.24 26.92,14.16 26.29,14.16
  Bottom 0.127: v20.51,27.5 21.27,28.26 IC1.14 | CL1.7 32.96,19.05 31.11,17.21 28.7,17.21 v28,16.51
C_D9  (via drill 0.3)
  Top 0.127: v29.02,19.94 29.02,20.07 28.7,20.38 27.05,20.38 25.91,21.53 25.15,21.53 v24.51,20.89 24.57,20.89 24.57,20.64 25.78,19.43 v25.78,18.67 | v28,11.37 CR1.8
  Bottom 0.127: v24.51,20.89 22.16,20.89 21.46,21.59 21.46,27.3 21.78,27.62 21.78,28.13 IC1.13 | v29.02,19.94 29.27,19.94 30.16,19.05 CL1.8 | v28,11.37 28,12.06 25.78,14.29 v25.78,18.67
C_D10  (via drill 0.3)
  Top 0.127: v22.16,25.21 22.61,25.21 26.99,20.83 v27.24,20.83 | 34.92,12.26 34.92,12.06 CR1.9 | v34.04,15.62 34.04,15.37 33.47,14.8 33.47,12.51 33.72,12.26 34.92,12.26 | 34.92,12.26 v34.92,12.32
  Bottom 0.127: v22.16,25.21 22.04,25.34 22.04,26.73 22.35,27.05 22.35,27.56 IC1.12 | v27.24,20.83 27.24,18.99 27.56,18.67 27.56,16.32 29.21,14.67 32.38,14.67 33.91,13.14 34.1,13.14 v34.92,12.32 | CL1.9 34.92,16.51 v34.04,15.62
C_D11  (via drill 0.3)
  Top 0.127: v22.61,25.65 24.51,23.75 24.51,23.69 24.77,23.43 31.11,23.43 v34.61,19.94 | CR1.10 32.32,13.27 v32.32,15.37
  Bottom 0.127: v22.61,25.65 22.61,26.16 22.92,26.48 22.92,26.99 IC1.11 | v34.61,19.94 37.15,19.94 37.4,19.68 37.4,15.88 36.7,15.18 32.32,15.18 | 32.32,15.18 31.81,15.18 CL1.10 | 32.32,15.18 v32.32,15.37
C_D12  (via drill 0.3)
  Top 0.127: v22.35,21.34 22.35,19.68 26.04,16 26.86,16 27.81,16.95 28.19,16.95 28.45,16.7 v28.45,16.07 | v35.56,13.08 CR1.11
  Bottom 0.127: v22.35,21.34 22.35,24.77 23.5,25.91 23.5,26.42 IC1.10 | v28.45,16.07 29.59,14.92 34.61,14.92 CR1.11 v35.56,13.08
C_D13  (via drill 0.3)
  Top 0.127: v25.4,21.08 25.4,20.19 v26.92,18.67 | v30.48,13.08 CR1.12
  Bottom 0.127: v25.4,21.08 25.4,24.07 24.13,25.34 24.13,25.84 IC1.9 | v26.92,18.67 26.92,16.76 27.3,16.38 27.3,16.19 29.53,13.97 CR1.12 v30.48,13.08
C_D14  (via drill 0.3)
  Top 0.127: CR1.13 33.72,14.67 33.72,12.89 v33.91,12.7
  Bottom 0.127: 33.91,12.38 34.23,12.38 35.18,11.43 CL1.13 | 33.91,12.38 29.59,12.38 27.05,14.92 27.05,16.26 26.48,16.83 26.48,18.86 26.8,19.18 26.8,21.02 27.69,21.91 27.69,24.57 26.67,25.59 26.67,25.84 IC1.8 | 33.91,12.38 v33.91,12.7
C_D15  (via drill 0.3)
  Top 0.127: v29.34,17.65 CR1.14 30.42,16.51 28.64,14.73 v28.64,12.32
  Bottom 0.127: v29.34,17.65 28,18.99 28,25.21 27.24,25.97 27.24,26.42 IC1.7 | CL1.14 29.53,11.43 v28.64,12.32
C_D16  (via drill 0.3)
  Top 0.127: v39.56,27.5 39.56,18.48 40.07,17.97 41.97,17.97 45.34,14.61 45.34,14.16 | 45.34,14.16 45.34,10.48 46.35,9.46 46.35,9.21 47.62,7.94 53.66,7.94 CR2.7 | v47.05,16.51 47.05,15.24 45.97,14.16 45.34,14.16
  Bottom 0.127: v39.56,27.5 40.32,28.26 IC2.14 | CL2.7 52.01,19.05 50.16,17.21 47.75,17.21 v47.05,16.51
C_D17  (via drill 0.3)
  Top 0.127: v48.07,19.94 48.07,20.07 47.75,20.38 46.1,20.38 44.96,21.53 44.2,21.53 v43.56,20.89 43.62,20.89 43.62,20.64 44.83,19.43 v44.83,18.67 | v47.05,11.37 CR2.8
  Bottom 0.127: v43.56,20.89 41.21,20.89 40.51,21.59 40.51,27.3 40.83,27.62 40.83,28.13 IC2.13 | v48.07,19.94 48.32,19.94 49.21,19.05 CL2.8 | v47.05,11.37 47.05,12.06 44.83,14.29 v44.83,18.67
C_D18  (via drill 0.3)
  Top 0.127: v41.21,25.21 41.66,25.21 46.04,20.83 v46.29,20.83 | 53.98,12.26 53.98,12.06 CR2.9 | v53.09,15.62 53.09,15.37 52.51,14.8 52.51,12.51 52.77,12.26 53.98,12.26 | 53.98,12.26 v53.98,12.32
  Bottom 0.127: v41.21,25.21 41.08,25.34 41.08,26.73 41.4,27.05 41.4,27.56 IC2.12 | v46.29,20.83 46.29,18.99 46.61,18.67 46.61,16.32 48.26,14.67 51.44,14.67 52.96,13.14 53.15,13.14 v53.98,12.32 | CL2.9 53.98,16.51 v53.09,15.62
C_D19  (via drill 0.3)
  Top 0.127: v41.66,25.65 43.56,23.75 43.56,23.69 43.81,23.43 50.16,23.43 v53.66,19.94 | CR2.10 51.37,13.27 v51.37,15.37
  Bottom 0.127: v41.66,25.65 41.66,26.16 41.97,26.48 41.97,26.99 IC2.11 | v53.66,19.94 56.2,19.94 56.45,19.68 56.45,15.88 55.75,15.18 51.37,15.18 | 51.37,15.18 50.86,15.18 CL2.10 | 51.37,15.18 v51.37,15.37
C_D20  (via drill 0.3)
  Top 0.127: v41.4,21.34 41.4,19.68 45.09,16 45.91,16 46.86,16.95 47.24,16.95 47.5,16.7 v47.5,16.07 | v54.61,13.08 CR2.11
  Bottom 0.127: v41.4,21.34 41.4,24.77 42.55,25.91 42.55,26.42 IC2.10 | v47.5,16.07 48.64,14.92 53.66,14.92 CR2.11 v54.61,13.08
C_D21  (via drill 0.3)
  Top 0.127: v44.45,21.08 44.45,20.19 v45.97,18.67 | v49.53,13.08 CR2.12
  Bottom 0.127: v44.45,21.08 44.45,24.07 43.18,25.34 43.18,25.84 IC2.9 | v45.97,18.67 45.97,16.76 46.35,16.38 46.35,16.19 48.58,13.97 CR2.12 v49.53,13.08
C_D22  (via drill 0.3)
  Top 0.127: CR2.13 52.77,14.67 52.77,12.89 v52.96,12.7
  Bottom 0.127: 52.96,12.38 53.28,12.38 54.23,11.43 CL2.13 | 52.96,12.38 48.64,12.38 46.1,14.92 46.1,16.26 45.53,16.83 45.53,18.86 45.85,19.18 45.85,21.02 46.74,21.91 46.74,24.57 45.72,25.59 45.72,25.84 IC2.8 | 52.96,12.38 v52.96,12.7
C_D23  (via drill 0.3)
  Top 0.127: v48.39,17.65 CR2.14 49.47,16.51 47.69,14.73 v47.69,12.32
  Bottom 0.127: v48.39,17.65 47.05,18.99 47.05,25.21 46.29,25.97 46.29,26.42 IC2.7 | CL2.14 48.58,11.43 v47.69,12.32
CL_OE  (via drill 0.3)
  Top 0.127: v6.73,33.4 6.73,32.96 4.57,30.8 4.57,28.13 2.16,25.72 v2.16,18.8 | v4.57,15.11 v2.16,17.53
  Bottom 0.127: v6.73,33.4 7.81,34.48 7.81,34.92 8.13,35.24 8.13,35.75 IC8.26 | v2.16,17.53 v2.16,18.8 | v4.57,15.11 4.57,14.73 4.32,14.48 4.32,10.6 11.11,3.81 CL.20
CL_OE1  (via drill 0.3)
  Top 0.127: v25.78,33.4 25.78,32.96 23.62,30.8 23.62,28.13 21.21,25.72 v21.21,18.8 | v23.62,15.11 v21.21,17.53
  Bottom 0.127: v25.78,33.4 26.86,34.48 26.86,34.92 27.18,35.24 27.18,35.75 IC1.26 | v21.21,17.53 v21.21,18.8 | v23.62,15.11 23.62,14.73 23.37,14.48 23.37,10.6 30.16,3.81 CL1.20
CL_OE2  (via drill 0.3)
  Top 0.127: v44.83,33.4 44.83,32.96 42.67,30.8 42.67,28.13 40.26,25.72 v40.26,18.8 | v42.67,15.11 v40.26,17.53
  Bottom 0.127: v44.83,33.4 45.91,34.48 45.91,34.92 46.23,35.24 46.23,35.75 IC2.26 | v40.26,17.53 v40.26,18.8 | v42.67,15.11 42.67,14.73 42.42,14.48 42.42,10.6 49.21,3.81 CL2.20
CL_PWDN
  Bottom 0.127: CL.16 J_CS1.2
CL_PWDN1
  Bottom 0.127: CL1.16 J_CS4.2
CL_PWDN2
  Bottom 0.127: CL2.16 J_CS7.2
CL_RCK  (via drill 0.3)
  Top 0.127: v4.32,34.04 3.87,34.04 1.02,31.18 1.02,18.03 v4.76,14.29
  Bottom 0.127: v4.32,34.04 4.32,34.35 3.94,34.73 3.94,35.18 IC8.22 | v4.76,14.29 4.76,10.54 8.95,6.35 CL.18
CL_RCK1  (via drill 0.3)
  Top 0.127: v23.37,34.04 22.92,34.04 20.07,31.18 20.07,18.03 v23.81,14.29
  Bottom 0.127: v23.37,34.04 23.37,34.35 22.99,34.73 22.99,35.18 IC1.22 | v23.81,14.29 23.81,10.54 28,6.35 CL1.18
CL_RCK2  (via drill 0.3)
  Top 0.127: v42.42,34.04 41.97,34.04 39.12,31.18 39.12,18.03 v42.86,14.29
  Bottom 0.127: v42.42,34.04 42.42,34.35 42.04,34.73 42.04,35.18 IC2.22 | v42.86,14.29 42.86,10.54 47.05,6.35 CL2.18
CL_RST  (via drill 0.3)
  Top 0.127: 6.45,17.62 6.41,17.59 6.03,17.59 v3.75,19.88 | 6.45,17.62 7.05,18.22 8.89,18.22 J_CS2.3 8.89,18.29 13.14,18.29 13.65,18.8 v13.65,20.32 | CR.22 12.76,26.67 v13.72,25.72 | v15.62,9.78 14.86,9.78 13.27,8.19 9.65,8.19 8.51,9.34 v8.51,13.14 | v7.18,16.45 7.18,16.89 6.45,17.62
  Bottom 0.127: CL.22 14.03,1.27 14.73,0.57 18.29,0.57 18.35,0.64 18.35,7.05 CL.15 v15.62,9.78 | v3.75,19.88 1.02,22.61 1.02,28.64 IC8.15 1.71,29.34 2.03,29.65 2.03,30.29 1.14,31.18 1.14,32.38 IC8.17 | v13.72,25.72 13.72,25.46 14.03,25.15 14.03,20.7 v13.65,20.32 | v8.51,13.14 7.18,14.48 v7.18,16.45
CL_RST1  (via drill 0.3)
  Top 0.127: 25.5,17.62 25.46,17.59 25.08,17.59 v22.8,19.88 | 25.5,17.62 26.1,18.22 27.94,18.22 J_CS5.3 27.94,18.29 32.19,18.29 32.7,18.8 v32.7,20.32 | CR1.22 31.81,26.67 v32.77,25.72 | v34.67,9.78 33.91,9.78 32.32,8.19 28.7,8.19 27.56,9.34 v27.56,13.14 | v26.23,16.45 26.23,16.89 25.5,17.62
  Bottom 0.127: CL1.22 33.08,1.27 33.78,0.57 37.34,0.57 37.4,0.64 37.4,7.05 CL1.15 v34.67,9.78 | v22.8,19.88 20.07,22.61 20.07,28.64 IC1.15 20.77,29.34 21.08,29.65 21.08,30.29 20.19,31.18 20.19,32.38 IC1.17 | v32.77,25.72 32.77,25.46 33.08,25.15 33.08,20.7 v32.7,20.32 | v27.56,13.14 26.23,14.48 v26.23,16.45
CL_RST2  (via drill 0.3)
  Top 0.127: 44.55,17.62 44.51,17.59 44.13,17.59 v41.85,19.88 | 44.55,17.62 45.15,18.22 46.99,18.22 J_CS8.3 46.99,18.29 51.24,18.29 51.75,18.8 v51.75,20.32 | CR2.22 50.86,26.67 v51.82,25.72 | v53.72,9.78 52.96,9.78 51.37,8.19 47.75,8.19 46.61,9.34 v46.61,13.14 | v45.28,16.45 45.28,16.89 44.55,17.62
  Bottom 0.127: CL2.22 52.13,1.27 52.83,0.57 56.39,0.57 56.45,0.64 56.45,7.05 CL2.15 v53.72,9.78 | v41.85,19.88 39.12,22.61 39.12,28.64 IC2.15 39.81,29.34 40.13,29.65 40.13,30.29 39.24,31.18 39.24,32.38 IC2.17 | v51.82,25.72 51.82,25.46 52.13,25.15 52.13,20.7 v51.75,20.32 | v46.61,13.14 45.28,14.48 v45.28,16.45
CL_VSYNC  (via drill 0.3)
  Top 0.127: v7.94,33.59 7.94,34.1 v7.37,34.67 | v10.22,25.27 v7.81,27.69
  Bottom 0.127: v7.94,33.59 8.95,34.61 9.27,34.61 IC8.28 | v7.37,34.67 6.29,33.59 6.29,31.11 7.81,29.59 v7.81,27.69 | v10.22,25.27 12.76,25.27 13.27,24.77 13.27,23.5 12.06,22.29 9.65,22.29 9.59,22.23 9.59,20.95 10.67,19.88 14.8,19.88 CL.5
CL_VSYNC1  (via drill 0.3)
  Top 0.127: v26.99,33.59 26.99,34.1 v26.42,34.67 | v29.27,25.27 v26.86,27.69
  Bottom 0.127: v26.99,33.59 28,34.61 28.32,34.61 IC1.28 | v26.42,34.67 25.34,33.59 25.34,31.11 26.86,29.59 v26.86,27.69 | v29.27,25.27 31.81,25.27 32.32,24.77 32.32,23.5 31.11,22.29 28.7,22.29 28.64,22.23 28.64,20.95 29.72,19.88 33.85,19.88 CL1.5
CL_VSYNC2  (via drill 0.3)
  Top 0.127: v46.04,33.59 46.04,34.1 v45.47,34.67 | v48.32,25.27 v45.91,27.69
  Bottom 0.127: v46.04,33.59 47.05,34.61 47.37,34.61 IC2.28 | v45.47,34.67 44.39,33.59 44.39,31.11 45.91,29.59 v45.91,27.69 | v48.32,25.27 50.86,25.27 51.37,24.77 51.37,23.5 50.16,22.29 47.75,22.29 47.69,22.23 47.69,20.95 48.77,19.88 52.9,19.88 CL2.5
CL_WR  (via drill 0.3)
  Top 0.127: v3.17,32.7 3.17,27.11 1.71,25.65 1.71,18.61 2.1,18.22 4.06,18.22 v7.68,14.61
  Bottom 0.127: v3.17,32.7 3.17,33.21 2.79,33.59 2.79,34.04 IC8.20 | v7.68,14.61 7.94,14.61 10.41,12.13 13.21,12.13 14.67,10.67 14.67,5.65 CL.19
CL_WR1  (via drill 0.3)
  Top 0.127: v22.23,32.7 22.23,27.11 20.77,25.65 20.77,18.61 21.14,18.22 23.11,18.22 v26.73,14.61
  Bottom 0.127: v22.23,32.7 22.23,33.21 21.84,33.59 21.84,34.04 IC1.20 | v26.73,14.61 26.99,14.61 29.46,12.13 32.26,12.13 33.72,10.67 33.72,5.65 CL1.19
CL_WR2  (via drill 0.3)
  Top 0.127: v41.27,32.7 41.27,27.11 39.81,25.65 39.81,18.61 40.2,18.22 42.16,18.22 v45.78,14.61
  Bottom 0.127: v41.27,32.7 41.27,33.21 40.89,33.59 40.89,34.04 IC2.20 | v45.78,14.61 46.04,14.61 48.51,12.13 51.31,12.13 52.77,10.67 52.77,5.65 CL2.19
CL_WRST  (via drill 0.3)
  Top 0.127: v15.68,22.48 18.1,22.48 18.35,22.23 18.35,18.41 18.1,18.16 14.99,18.16 14.16,17.34 v14.16,10.48
  Bottom 0.127: v15.68,22.48 14.41,23.75 14.41,26.92 12.89,28.45 12.51,28.45 12.38,28.32 11.3,28.32 10.92,28.7 10.48,28.7 IC8.3 | v14.16,10.48 14.16,9.59 14.41,9.34 14.41,3.37 CL.21
CL_WRST1  (via drill 0.3)
  Top 0.127: v34.73,22.48 37.15,22.48 37.4,22.23 37.4,18.41 37.15,18.16 34.04,18.16 33.21,17.34 v33.21,10.48
  Bottom 0.127: v34.73,22.48 33.47,23.75 33.47,26.92 31.94,28.45 31.56,28.45 31.43,28.32 30.35,28.32 29.97,28.7 29.53,28.7 IC1.3 | v33.21,10.48 33.21,9.59 33.47,9.34 33.47,3.37 CL1.21
CL_WRST2  (via drill 0.3)
  Top 0.127: v53.78,22.48 56.2,22.48 56.45,22.23 56.45,18.41 56.2,18.16 53.09,18.16 52.26,17.34 v52.26,10.48
  Bottom 0.127: v53.78,22.48 52.51,23.75 52.51,26.92 50.99,28.45 50.61,28.45 50.48,28.32 49.4,28.32 49.02,28.7 48.58,28.7 IC2.3 | v52.26,10.48 52.26,9.59 52.51,9.34 52.51,3.37 CL2.21
CR_OE  (via drill 0.3)
  Top 0.127: v16.57,27.88 17.78,27.88 18.35,27.3 18.35,23.5 18.29,23.43 12.45,23.43 11.75,24.13 CR.20
  Bottom 0.127: v16.57,27.88 13.14,31.3 10.92,31.3 10.6,30.99 8.83,30.99 7.49,32.32 7.49,33.78 8.7,34.99 8.7,35.18 IC8.27
CR_OE1  (via drill 0.3)
  Top 0.127: v35.62,27.88 36.83,27.88 37.4,27.3 37.4,23.5 37.34,23.43 31.5,23.43 30.8,24.13 CR1.20
  Bottom 0.127: v35.62,27.88 32.19,31.3 29.97,31.3 29.65,30.99 27.88,30.99 26.54,32.32 26.54,33.78 27.75,34.99 27.75,35.18 IC1.27
CR_OE2  (via drill 0.3)
  Top 0.127: v54.67,27.88 55.88,27.88 56.45,27.3 56.45,23.5 56.39,23.43 50.55,23.43 49.85,24.13 CR2.20
  Bottom 0.127: v54.67,27.88 51.24,31.3 49.02,31.3 48.7,30.99 46.93,30.99 45.59,32.32 45.59,33.78 46.8,34.99 46.8,35.18 IC2.27
CR_PWDN
  Top 0.127: CR.16 J_CS2.2
CR_PWDN1
  Top 0.127: CR1.16 J_CS5.2
CR_PWDN2
  Top 0.127: CR2.16 J_CS8.2
CR_RCK  (via drill 0.3)
  Top 0.127: v6.48,30.29 v5.59,31.18 | v7.3,22.99 10.03,22.99 CR.18
  Bottom 0.127: v5.59,31.18 5.59,34.23 4.51,35.31 4.51,35.75 IC8.23 | v6.48,30.29 6.48,29.59 7.24,28.83 7.24,26.86 6.67,26.29 6.67,23.62 v7.3,22.99
CR_RCK1  (via drill 0.3)
  Top 0.127: v25.53,30.29 v24.64,31.18 | v26.35,22.99 29.08,22.99 CR1.18
  Bottom 0.127: v24.64,31.18 24.64,34.23 23.56,35.31 23.56,35.75 IC1.23 | v25.53,30.29 25.53,29.59 26.29,28.83 26.29,26.86 25.72,26.29 25.72,23.62 v26.35,22.99
CR_RCK2  (via drill 0.3)
  Top 0.127: v44.58,30.29 v43.69,31.18 | v45.4,22.99 48.13,22.99 CR2.18
  Bottom 0.127: v43.69,31.18 43.69,34.23 42.61,35.31 42.61,35.75 IC2.23 | v44.58,30.29 44.58,29.59 45.34,28.83 45.34,26.86 44.77,26.29 44.77,23.62 v45.4,22.99
CR_RST  (via drill 0.3)
  Top 0.127: v13.59,11.11 13.59,15.05 13.91,15.37 13.91,17.46 15.49,19.05 CR.15 | v5.84,10.99 v1.71,15.11
  Bottom 0.127: 8.89,9.72 12.19,9.72 v13.59,11.11 | v1.71,15.11 0.76,16.07 0.76,29.02 1.08,29.34 1.08,29.78 IC8.16 | v5.84,10.99 7.62,10.99 8.89,9.72 | 8.89,9.72 J_CS1.3
CR_RST1  (via drill 0.3)
  Top 0.127: v32.64,11.11 32.64,15.05 32.96,15.37 32.96,17.46 34.54,19.05 CR1.15 | v24.89,10.99 v20.77,15.11
  Bottom 0.127: 27.94,9.72 31.24,9.72 v32.64,11.11 | v20.77,15.11 19.81,16.07 19.81,29.02 20.13,29.34 20.13,29.78 IC1.16 | v24.89,10.99 26.67,10.99 27.94,9.72 | 27.94,9.72 J_CS4.3
CR_RST2  (via drill 0.3)
  Top 0.127: v51.69,11.11 51.69,15.05 52.01,15.37 52.01,17.46 53.59,19.05 CR2.15 | v43.94,10.99 v39.81,15.11
  Bottom 0.127: 46.99,9.72 50.29,9.72 v51.69,11.11 | v39.81,15.11 38.86,16.07 38.86,29.02 39.18,29.34 39.18,29.78 IC2.16 | v43.94,10.99 45.72,10.99 46.99,9.72 | 46.99,9.72 J_CS7.3
CR_VSYNC  (via drill 0.3)
  Top 0.127: v0.51,34.04 0.51,14.99 4.51,10.99 v5.21,10.99 | v7.81,9.27 10.03,7.05 15.81,7.05 CR.5
  Bottom 0.127: v0.51,34.04 3.75,37.27 8.06,37.27 10.22,35.12 10.22,34.92 9.91,34.61 9.91,34.1 IC8.29 | v5.21,10.99 5.65,10.54 6.54,10.54 v7.81,9.27
CR_VSYNC1  (via drill 0.3)
  Top 0.127: v19.56,34.04 19.56,14.99 23.56,10.99 v24.26,10.99 | v26.86,9.27 29.08,7.05 34.86,7.05 CR1.5
  Bottom 0.127: v19.56,34.04 22.8,37.27 27.11,37.27 29.27,35.12 29.27,34.92 28.96,34.61 28.96,34.1 IC1.29 | v24.26,10.99 24.7,10.54 25.59,10.54 v26.86,9.27
CR_VSYNC2  (via drill 0.3)
  Top 0.127: v38.61,34.04 38.61,14.99 42.61,10.99 v43.31,10.99 | v45.91,9.27 48.13,7.05 53.91,7.05 CR2.5
  Bottom 0.127: v38.61,34.04 41.85,37.27 46.16,37.27 48.32,35.12 48.32,34.92 48.01,34.61 48.01,34.1 IC2.29 | v43.31,10.99 43.75,10.54 44.64,10.54 v45.91,9.27
CR_WR  (via drill 0.3)
  Top 0.127: v6.54,27.62 6.54,25.53 7.75,24.32 7.75,24.19 8,23.94 8.76,23.94 9.65,24.83 14.35,24.83 15.05,24.13 CR.19
  Bottom 0.127: v6.54,27.62 1.71,32.45 1.71,32.89 IC8.18
CR_WR1  (via drill 0.3)
  Top 0.127: v25.59,27.62 25.59,25.53 26.8,24.32 26.8,24.19 27.05,23.94 27.81,23.94 28.7,24.83 33.4,24.83 34.1,24.13 CR1.19
  Bottom 0.127: v25.59,27.62 20.77,32.45 20.77,32.89 IC1.18
CR_WR2  (via drill 0.3)
  Top 0.127: v44.64,27.62 44.64,25.53 45.85,24.32 45.85,24.19 46.1,23.94 46.86,23.94 47.75,24.83 52.45,24.83 53.15,24.13 CR2.19
  Bottom 0.127: v44.64,27.62 39.81,32.45 39.81,32.89 IC2.18
CR_WRST  (via drill 0.3)
  Top 0.127: v15.18,25.78 15.3,25.78 16.19,26.67 CR.21
  Bottom 0.127: v15.18,25.78 14.92,25.78 14.67,26.04 14.67,27.05 13.02,28.7 12.06,28.7 11.49,29.27 11.05,29.27 IC8.2
CR_WRST1  (via drill 0.3)
  Top 0.127: v34.23,25.78 34.35,25.78 35.24,26.67 CR1.21
  Bottom 0.127: v34.23,25.78 33.97,25.78 33.72,26.04 33.72,27.05 32.07,28.7 31.11,28.7 30.54,29.27 30.1,29.27 IC1.2
CR_WRST2  (via drill 0.3)
  Top 0.127: v53.28,25.78 53.4,25.78 54.29,26.67 CR2.21
  Bottom 0.127: v53.28,25.78 53.02,25.78 52.77,26.04 52.77,27.05 51.12,28.7 50.16,28.7 49.59,29.27 49.15,29.27 IC2.2
CS0
  Top 0.127: 72.33,16.45 72.26,16.45 70.61,18.1 67.82,18.1 67.06,18.86 U$3.A5 | 72.33,16.45 73.03,16.45 U$1.CSN | SV4.7 69.85,11.3 71.44,12.89 71.44,15.56 72.33,16.45
  Bottom 0.127: IC6.6 67.31,25.78 65.53,24 65.53,20.38 66.99,18.92 U$3.A5
CS1
  Top 0.127: 72.33,55.82 72.26,55.82 70.61,57.47 67.82,57.47 67.06,58.23 U$4.A5 | 72.33,55.82 73.03,55.82 U$2.CSN | SV5.7 69.85,50.67 71.44,52.26 71.44,54.93 72.33,55.82
  Bottom 0.127: IC7.6 67.31,65.15 65.53,63.37 65.53,59.75 66.99,58.29 U$4.A5
DW
  Bottom 0.127: IC6.4 64.77,28.45 65.66,29.34 68.96,29.34 70.04,28.26 70.04,14.29 68.26,12.51 68.26,12.26 67.12,11.11 66.86,11.11 66.04,10.29 66.04,6.99 67.06,5.97 R39.2 67.06,5.71 68.96,3.81 D2.A DW.1
DW1
  Bottom 0.127: IC7.4 64.77,67.82 65.66,68.71 68.96,68.71 70.04,67.63 70.04,53.66 68.26,51.88 68.26,51.63 67.12,50.48 66.86,50.48 66.04,49.66 66.04,46.35 67.06,45.34 R44.2 67.06,45.09 68.96,43.18 D1.A DW1.1
GND  (via drill 0.35, 0.38)
  Top 0.381: C15.2 4.45,1.78 4.7,1.52 C5.- 4.32,1.65 2.29,1.65 SV1.5 | v10.48,2.22 CR.2 | C1.2 15.88,33.02 14.03,34.86 13.4,34.86 | 13.4,34.86 13.02,34.86 v12.51,35.37 | v12.7,27.94 BUS.6 12.83,30.73 v12.83,32.96 | v13.4,34.16 13.4,34.86 | v13.72,9.34 13.84,9.34 15.11,10.6 18.35,10.6 18.48,10.73 18.48,17.21 18.03,17.65 v15.18,17.65 | v14.29,18.54 14.29,20.51 v13.53,21.27
  Bottom 0.381: SV1.5 6.03,1.27 6.99,2.22 v10.48,2.22 10.6,2.35 12.64,2.35 13.72,3.43 v13.72,9.34 | PAD6.1 v12.51,35.37 | CL.2 10.48,26.67 9.59,27.56 9.34,27.56 IC8.5 | v12.7,27.94 CL.2 | v13.4,34.16 13.4,33.53 v12.83,32.96 | v14.29,18.54 v15.18,17.65 | v13.53,21.27 13.53,23.18 13.65,23.3 13.65,24.96 11.81,26.8 CL.2
  other vias: 8.26,4.45 8.26,3.81 13.34,5.08 11.43,5.08 1.27,36.2 1.27,36.83 13.34,22.86 10.16,36.83 10.16,37.47 15.24,34.67
  pour Bottom: 0,0 19.05,0 19.05,38.1 0,38.1
  pour Top: 0,0 19.05,0 19.05,38.1 0,38.1
GND1  (via drill 0.35, 0.38)
  Top 0.381: C2.2 23.5,1.78 23.75,1.52 C3.- 23.37,1.65 21.34,1.65 SV2.5 | v29.53,2.22 CR1.2 | C4.2 34.92,33.02 33.08,34.86 32.45,34.86 | 32.45,34.86 32.07,34.86 v31.56,35.37 | v31.75,27.94 BUS1.6 31.88,30.73 v31.88,32.96 | v32.45,34.16 32.45,34.86 | v32.77,9.34 32.89,9.34 34.16,10.6 37.4,10.6 37.53,10.73 37.53,17.21 37.08,17.65 v34.23,17.65 | v33.34,18.54 33.34,20.51 v32.58,21.27
  Bottom 0.381: SV2.5 25.08,1.27 26.04,2.22 v29.53,2.22 29.65,2.35 31.69,2.35 32.77,3.43 v32.77,9.34 | PAD12.1 v31.56,35.37 | CL1.2 29.53,26.67 28.64,27.56 28.38,27.56 IC1.5 | v31.75,27.94 CL1.2 | v32.45,34.16 32.45,33.53 v31.88,32.96 | v33.34,18.54 v34.23,17.65 | v32.58,21.27 32.58,23.18 32.7,23.3 32.7,24.96 30.86,26.8 CL1.2
  other vias: 27.3,4.45 27.3,3.81 32.38,5.08 30.48,5.08 20.32,36.2 20.32,36.83 32.38,22.86 29.21,36.83 29.21,37.47 34.29,34.67
  pour Bottom: 19.05,0 38.1,0 38.1,38.1 19.05,38.1
  pour Top: 19.05,0 38.1,0 38.1,38.1 19.05,38.1
GND2  (via drill 0.35, 0.38)
  Top 0.381: C6.2 42.55,1.78 42.8,1.52 C7.- 42.42,1.65 40.39,1.65 SV3.5 | v48.58,2.22 CR2.2 | C8.2 53.98,33.02 52.13,34.86 51.5,34.86 | 51.5,34.86 51.12,34.86 v50.61,35.37 | v50.8,27.94 BUS2.6 50.93,30.73 v50.93,32.96 | v51.5,34.16 51.5,34.86 | v51.82,9.34 51.94,9.34 53.21,10.6 56.45,10.6 56.58,10.73 56.58,17.21 56.13,17.65 v53.28,17.65 | v52.39,18.54 52.39,20.51 v51.63,21.27
  Bottom 0.381: SV3.5 44.13,1.27 45.09,2.22 v48.58,2.22 48.7,2.35 50.74,2.35 51.82,3.43 v51.82,9.34 | PAD18.1 v50.61,35.37 | CL2.2 48.58,26.67 47.69,27.56 47.43,27.56 IC2.5 | v50.8,27.94 CL2.2 | v51.5,34.16 51.5,33.53 v50.93,32.96 | v52.39,18.54 v53.28,17.65 | v51.63,21.27 51.63,23.18 51.75,23.3 51.75,24.96 49.91,26.8 CL2.2
  other vias: 46.35,4.45 46.35,3.81 51.44,5.08 49.53,5.08 39.37,36.2 39.37,36.83 51.44,22.86 48.26,36.83 48.26,37.47 53.34,34.67
  pour Bottom: 38.1,0 57.15,0 57.15,38.1 38.1,38.1
  pour Top: 38.1,0 57.15,0 57.15,38.1 38.1,38.1
GND3  (via drill 0.3, 0.35)
  Top 0.635: 5.79,44.49 6.98,44.49 I2C10.8 | 5.79,44.49 4.46,44.49 I2C10.10 | 5.79,44.49 5.79,47.5 6.98,48.69 6.98,53.3 I2C6.6 | GND.1 17.88,74.18 17.18,74.88 R.13 16.83,74.95 v13.12,78.65 | v6.63,65.38 6.63,67.41 6,68.03 IC3.5 5.79,68.31 4.74,69.36 4.74,71.39 5.93,72.57 v7.75,72.57
  Bottom 0.635: C9.2 5.09,64.4 6.63,64.4 7.19,63.84 C10.- | v6.63,65.38 6.63,64.68 C10.- | v7.75,72.57 6.98,73.34 6.98,74.88 SPI.6 7.19,75.16 8.17,76.14 8.17,77.81 9,78.65 v13.12,78.65 | I2C6.6 6.98,53.37 6.98,54.2 5.79,55.39 5.79,57.98 7.12,59.3 7.12,63.49 C10.-
  other vias: 11.43,66.04 12.7,64.77 15.37,64.52 14.61,76.83 14.61,78.74 1.27,78.74 2.54,78.74 13.21,51.56 12.06,50.16 12.7,49.53 17.14,60.96 17.14,63.5 17.14,55.88 17.14,53.34 8.89,68.58 5.97,76.71
  pour Top: 0,41.91 19.05,41.91 19.05,80.01 0,80.01
  pour Bottom: 0,41.91 19.05,41.91 19.05,80.01 0,80.01
GND4  (via drill 0.3, 0.35)
  Top 0.635: 24.84,44.49 26.03,44.49 I2C1.8 | 24.84,44.49 23.51,44.49 I2C1.10 | 24.84,44.49 24.84,47.5 26.03,48.69 26.03,53.3 I2C2.6 | GND1.1 36.92,74.18 36.23,74.88 R22.13 35.88,74.95 v32.17,78.65 | v25.68,65.38 25.68,67.41 25.05,68.03 IC4.5 24.84,68.31 23.79,69.36 23.79,71.39 24.98,72.57 v26.8,72.57
  Bottom 0.635: C11.2 24.14,64.4 25.68,64.4 26.24,63.84 C12.- | v25.68,65.38 25.68,64.68 C12.- | v26.8,72.57 26.03,73.34 26.03,74.88 SPI1.6 26.24,75.16 27.22,76.14 27.22,77.81 28.05,78.65 v32.17,78.65 | I2C2.6 26.03,53.37 26.03,54.2 24.84,55.39 24.84,57.98 26.17,59.3 26.17,63.49 C12.-
  other vias: 30.48,66.04 31.75,64.77 34.42,64.52 33.66,76.83 33.66,78.74 20.32,78.74 21.59,78.74 32.26,51.56 31.11,50.16 31.75,49.53 36.2,60.96 36.2,63.5 36.2,55.88 36.2,53.34 27.94,68.58 25.02,76.71
  pour Top: 19.05,41.91 38.1,41.91 38.1,80.01 19.05,80.01
  pour Bottom: 19.05,41.91 38.1,41.91 38.1,80.01 19.05,80.01
GND5  (via drill 0.3, 0.35)
  Top 0.635: 43.89,44.49 45.08,44.49 I2C3.8 | 43.89,44.49 42.56,44.49 I2C3.10 | 43.89,44.49 43.89,47.5 45.08,48.69 45.08,53.3 I2C4.6 | GND2.1 55.98,74.18 55.28,74.88 R31.13 54.93,74.95 v51.23,78.65 | v44.73,65.38 44.73,67.41 44.1,68.03 IC5.5 43.89,68.31 42.84,69.36 42.84,71.39 44.03,72.57 v45.85,72.57
  Bottom 0.635: C13.2 43.19,64.4 44.73,64.4 45.29,63.84 C14.- | v44.73,65.38 44.73,64.68 C14.- | v45.85,72.57 45.08,73.34 45.08,74.88 SPI2.6 45.29,75.16 46.27,76.14 46.27,77.81 47.1,78.65 v51.23,78.65 | I2C4.6 45.08,53.37 45.08,54.2 43.89,55.39 43.89,57.98 45.22,59.3 45.22,63.49 C14.-
  other vias: 49.53,66.04 50.8,64.77 53.47,64.52 52.7,76.83 52.7,78.74 39.37,78.74 40.64,78.74 51.31,51.56 50.16,50.16 50.8,49.53 55.24,60.96 55.24,63.5 55.24,55.88 55.24,53.34 46.99,68.58 44.07,76.71
  pour Top: 38.1,41.91 57.15,41.91 57.15,80.01 38.1,80.01
  pour Bottom: 38.1,41.91 57.15,41.91 57.15,80.01 38.1,80.01
GND6  (via drill 0.35, 0.76)
  Top 0.762: X1.6 65.72,6.35 66.42,5.65 69.15,5.65 GND_.1 69.66,6.67 69.66,7.11 69.47,7.3 69.47,8.32 70.04,8.89 71.12,8.89 SV4.9 | v71.44,33.72 71.06,33.34 71.06,31.94 U$3.B7 | C18.- 59.18,14.54 61.02,16.38 U$1.GND0
  Bottom 0.762: U$3.A8 73.09,18.86 73.09,18.03 74.23,16.89 74.23,14.54 SV4.10 SV4.9 | C16.2 59.56,24.19 IC6.14 60.77,22.48 60.77,21.14 59.24,19.62 59.24,19.24 U$3.A1 | U$3.A1 58.99,18.86 57.85,17.72 57.85,15.88 59.18,14.54 C17.- 59.31,12.95 60.64,11.62 60.64,9.91 61.66,8.89 61.91,8.89 64.45,6.35 X1.6 | v71.44,33.72 70.23,33.72 69.6,34.35 U$1.GND1 | U$3.A1 59.05,18.41 61.02,16.45 U$1.GND0
  other vias: 72.39,26.67 72.39,27.94 68.58,20.32 59.69,5.08 58.42,22.86
  pour Top: 74.93,0 74.93,38.1 57.15,38.1 57.15,0
  pour Bottom: 74.93,0 74.93,38.1 57.15,38.1 57.15,0
GND7  (via drill 0.35, 0.76)  (1 unrouted)
  Top 0.762: X2.6 65.72,45.72 66.42,45.02 69.15,45.02 GND_1.1 69.66,46.04 69.66,46.48 69.47,46.67 69.47,47.69 70.04,48.26 71.12,48.26 SV5.9 | v71.44,73.09 71.06,72.71 71.06,71.31 U$4.B7 | C21.- 59.18,53.91 61.02,55.75 U$2.GND0
  Bottom 0.762: U$4.A8 73.09,58.23 73.09,57.4 74.23,56.26 74.23,53.91 SV5.10 SV5.9 | C19.2 59.56,63.56 IC7.14 60.77,61.85 60.77,60.52 59.24,58.99 59.24,58.61 U$4.A1 | U$4.A1 58.99,58.23 57.85,57.09 57.85,55.24 59.18,53.91 C20.- 59.31,52.32 60.64,50.99 60.64,49.28 61.66,48.26 61.91,48.26 64.45,45.72 X2.6 | v71.44,73.09 70.23,73.09 69.6,73.72 U$2.GND1 | U$4.A1 59.05,57.78 61.02,55.82 U$2.GND0
  other vias: 72.39,66.04 72.39,67.31 68.58,59.69 59.69,44.45 58.42,62.23
  pour Top: 74.93,41.91 74.93,80.01 57.15,80.01 57.15,41.91
  pour Bottom: 57.15,41.91
GPIO0  (via drill 0.3)
  Top 0.127: 70.99,15.49 70.99,13.84 SV4.8 | 70.99,15.49 70.99,16.38 U$1.GDO0 | v69.6,15.49 70.99,15.49
  Bottom 0.127: U$3.B3 62.99,31.94 62.23,32.7 60.71,32.7 60.2,32.19 60.2,31.62 61.59,30.23 61.59,26.92 62.23,26.29 IC6.13 62.23,21.78 60.2,19.75 60.2,18.61 61.91,16.89 61.91,16.26 62.67,15.49 v69.6,15.49
GPIO1
  Bottom 0.127: IC6.12 63.5,25.21 63.18,25.53 63.18,26.61 62.74,27.05 62.74,30.23 61.09,31.88 U$3.B2
GPIO2
  Top 0.127: SV4.6 67.31,14.67 69.03,16.38 U$1.GDO2
  Bottom 0.127: U$1.GDO2 69.03,16.45 67.63,17.84 64.96,17.84 64.2,18.61 64.2,19.18 64.77,19.75 IC6.11 64.77,24.7 64.2,25.27 64.2,31.88 63.12,32.96 60.58,32.96 59.56,31.94 59.05,31.94 U$3.B1
GPIO3  (via drill 0.3)